# EAGLE board smd555 (EAGLE 7.1.0)
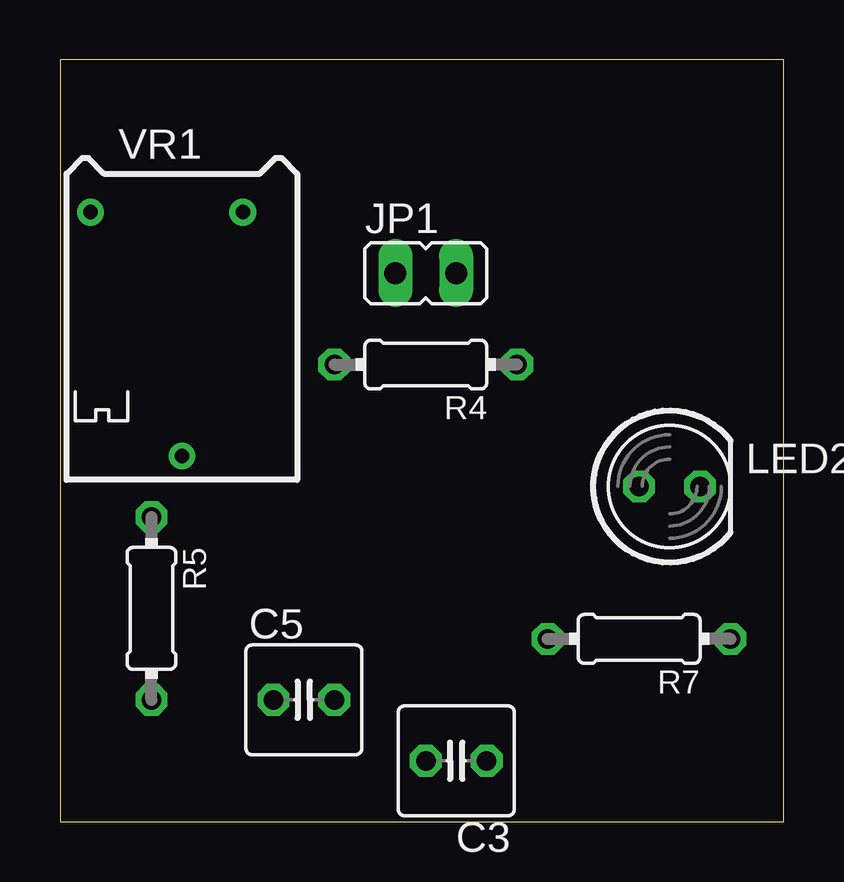
[diagram p0: board, top side]
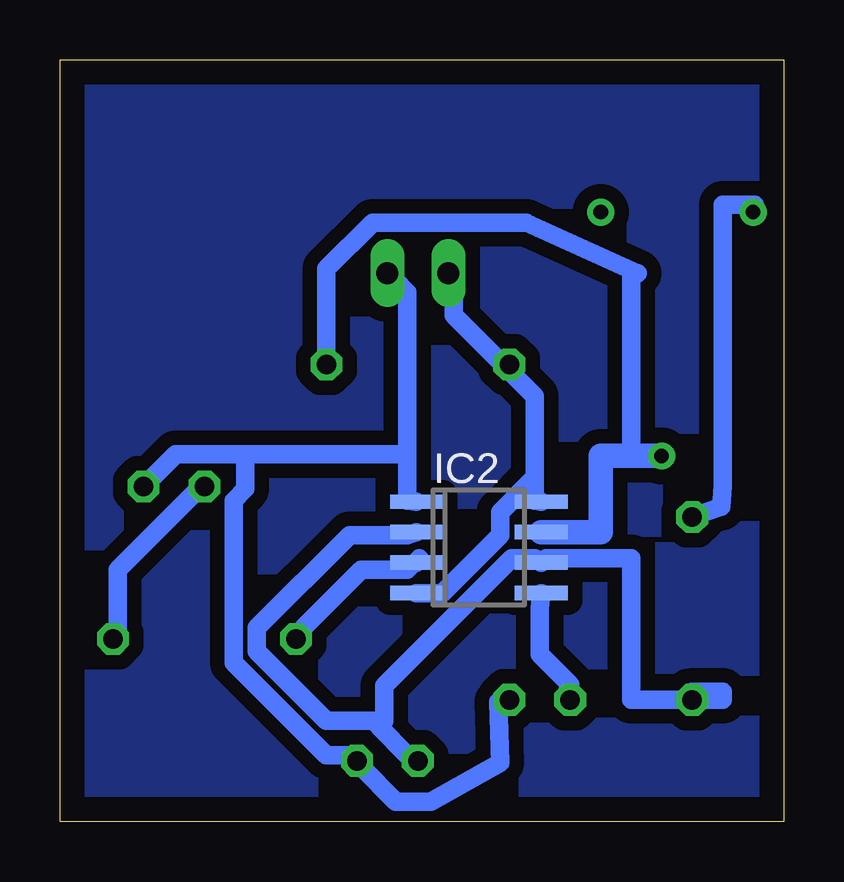
[diagram p1: board, bottom side, seen from below]

Size 30.15 x 31.74 mm. Coordinates in mm from the lower left corner, seen from the top.
Outline: 0,0 30.15,0 30.15,31.74 0,31.74 0,0
Copper layers (1*16): Top 0.035mm / dielectric 1.5mm / Bottom 0.035mm
Design rules "default *": minimum track width 30mil, minimum drill 24mil, track to track 8mil, track to pad 8mil, pad to pad 8mil, via to via 8mil, smd to smd 8mil, copper to edge 40mil, drill to drill 8mil, minimum pad ring 10mil, minimum via ring 8mil, stop-mask expansion 4mil, vias tented up to drill 0mil, thermal gap 10mil

## Footprints (pad centres in the part's own frame; a part is rotated, then mirrored left to right if it is on the bottom)
C025-050X050 = drill 0.813 octagon: 1 -1.27,0; 2 1.27,0
SO08 = smd 0.6 x 2.2: 1 -1.905,-2.6; 2 -0.635,-2.6; 3 0.635,-2.6; 4 1.905,-2.6; 5 1.905,2.6; 6 0.635,2.6; 7 -0.635,2.6; 8 -1.905,2.6
JP1 = drill 0.914 long: 1 0,-1.27; 2 0,1.27
LED5MM = drill 0.813 octagon: A -1.27,0; K 1.27,0
0204/7 = drill 0.813 octagon: 1 -3.81,0; 2 3.81,0
RTRIM64P = drill 0.61: 1 -2.54,-3.81; 2 7.62,0; 3 -2.54,2.54

## Placement (x,y rotation side)
C3  100UF  [C025-050X050]  16.51,2.54 180 top
C5  0.1UF  [C025-050X050]  10.16,5.08 0 top
IC2  SE555D  [SO08]  12.7,11.43 270 bottom
JP1  [JP1]  15.24,22.86 270 top
LED2  5mm  [LED5MM]  25.4,13.97 0 top
R4  4.7K  [0204/7]  15.24,19.05 180 top
R5  1K  [0204/7]  3.81,8.89 270 top
R7  220E  [0204/7]  24.13,7.62 180 top
VR1  100k  [RTRIM64P]  5.08,22.86 270 top

## Library data of the parts
C3 C5 R4 R5 R7 = rcl
IC2 = linear
JP1 = jumper
LED2 = led
VR1 = resistor

## Nets
+5V: IC2.4 IC2.8 JP1.1 R4.2
GND: C3.1 C5.2 IC2.1 JP1.2 LED2.K
N$1: IC2.3 R7.2
N$2: C5.1 IC2.5
N$3: LED2.A R7.1
N$4: C3.2 IC2.2 IC2.6 R5.2
N$7: R5.1 VR1.1
N$14: IC2.7 R4.1 VR1.2

## Tracks (layer width: path | path; a pad name or v marks a point on that pad's centre or on a via)
+5V
  Bottom 0.762: 10.36,14.35 10.36,17.73 11.33,18.69 R4.2 11.81,19.18 13.74,21.11 13.74,22.55 JP1.1 | 10.36,14.35 10.36,13.39 IC2.8 | IC2.4 14.22,9.53 11.81,11.94 11.81,12.9 10.36,14.35
GND
  Bottom 0.762: C5.2 11.89,5 11.81,2.46 14.71,0.84 16.15,0.84 17.6,2.29 C3.1 18.09,2.77 19.05,2.77 22.91,6.63 22.91,13.39 22.43,13.87 22.43,15.32 | 15.67,15.32 15.67,22.07 16.15,22.55 JP1.2 | 15.67,15.32 15.67,13.39 IC2.1 | LED2.K 25.32,15.32 22.43,15.32 | 15.67,15.32 22.43,15.32
N$1
  Bottom 0.762: IC2.3 15.19,10.97 15.67,10.49 17.6,10.49 20.02,8.08 R7.2
N$2
  Bottom 0.762: IC2.5 10.16,8.89 10.16,6.99 8.89,5.71 C5.1 8.99,5.49
N$3
  Bottom 0.762: R7.1 27.74,8.08 27.74,10.49 24.36,13.87 LED2.A
N$4
  Bottom 0.762: 3.81,5.41 2.54,5.41 | 2.54,5.41 2.54,5.08 R5.2 | R5.2 6.35,5.08 6.35,10.97 9.88,10.97 IC2.6 10.36,10.97 11.33,10.97 16.64,5.66 16.64,4.22 16.88,3.98 | 2.54,5.41 R5.2 | 16.88,3.98 15.67,2.77 C3.2 | 16.88,3.98 17.12,4.22 19.05,4.22 21.95,7.11 21.95,8.08 18.09,11.94 15.67,11.94 IC2.2
N$5
  pour Bottom (isolate 0.61): 1.27,0 0,1.27 0,29.21 2.54,31.75 27.94,31.75 30.48,29.21 30.48,1.27 29.21,0
N$7
  Bottom 0.762: VR1.1 1.19,25.38 1.19,25.7 2.54,25.7 2.54,13.97 2.59,13.13 R5.1
N$14
  Bottom 0.762: VR1.2 6.35,15.24 6.35,22.86 6.07,22.86 10.72,24.97 17.12,24.97 19.05,23.04 R4.1
  Bottom 1.016: IC2.7 7.62,12.06 7.62,15.24 VR1.2